# Altium PCB Circuit.PcbDoc (part 1 of 2)
Units mm, origin at the board's own origin, x right, y up, seen from the top; angles counter-clockwise.
Board outline 134.47 x 95.89 mm, 2 copper layers (Top Layer, Bottom Layer); 91 components, 54 nets, 361 pads, 33 vias.
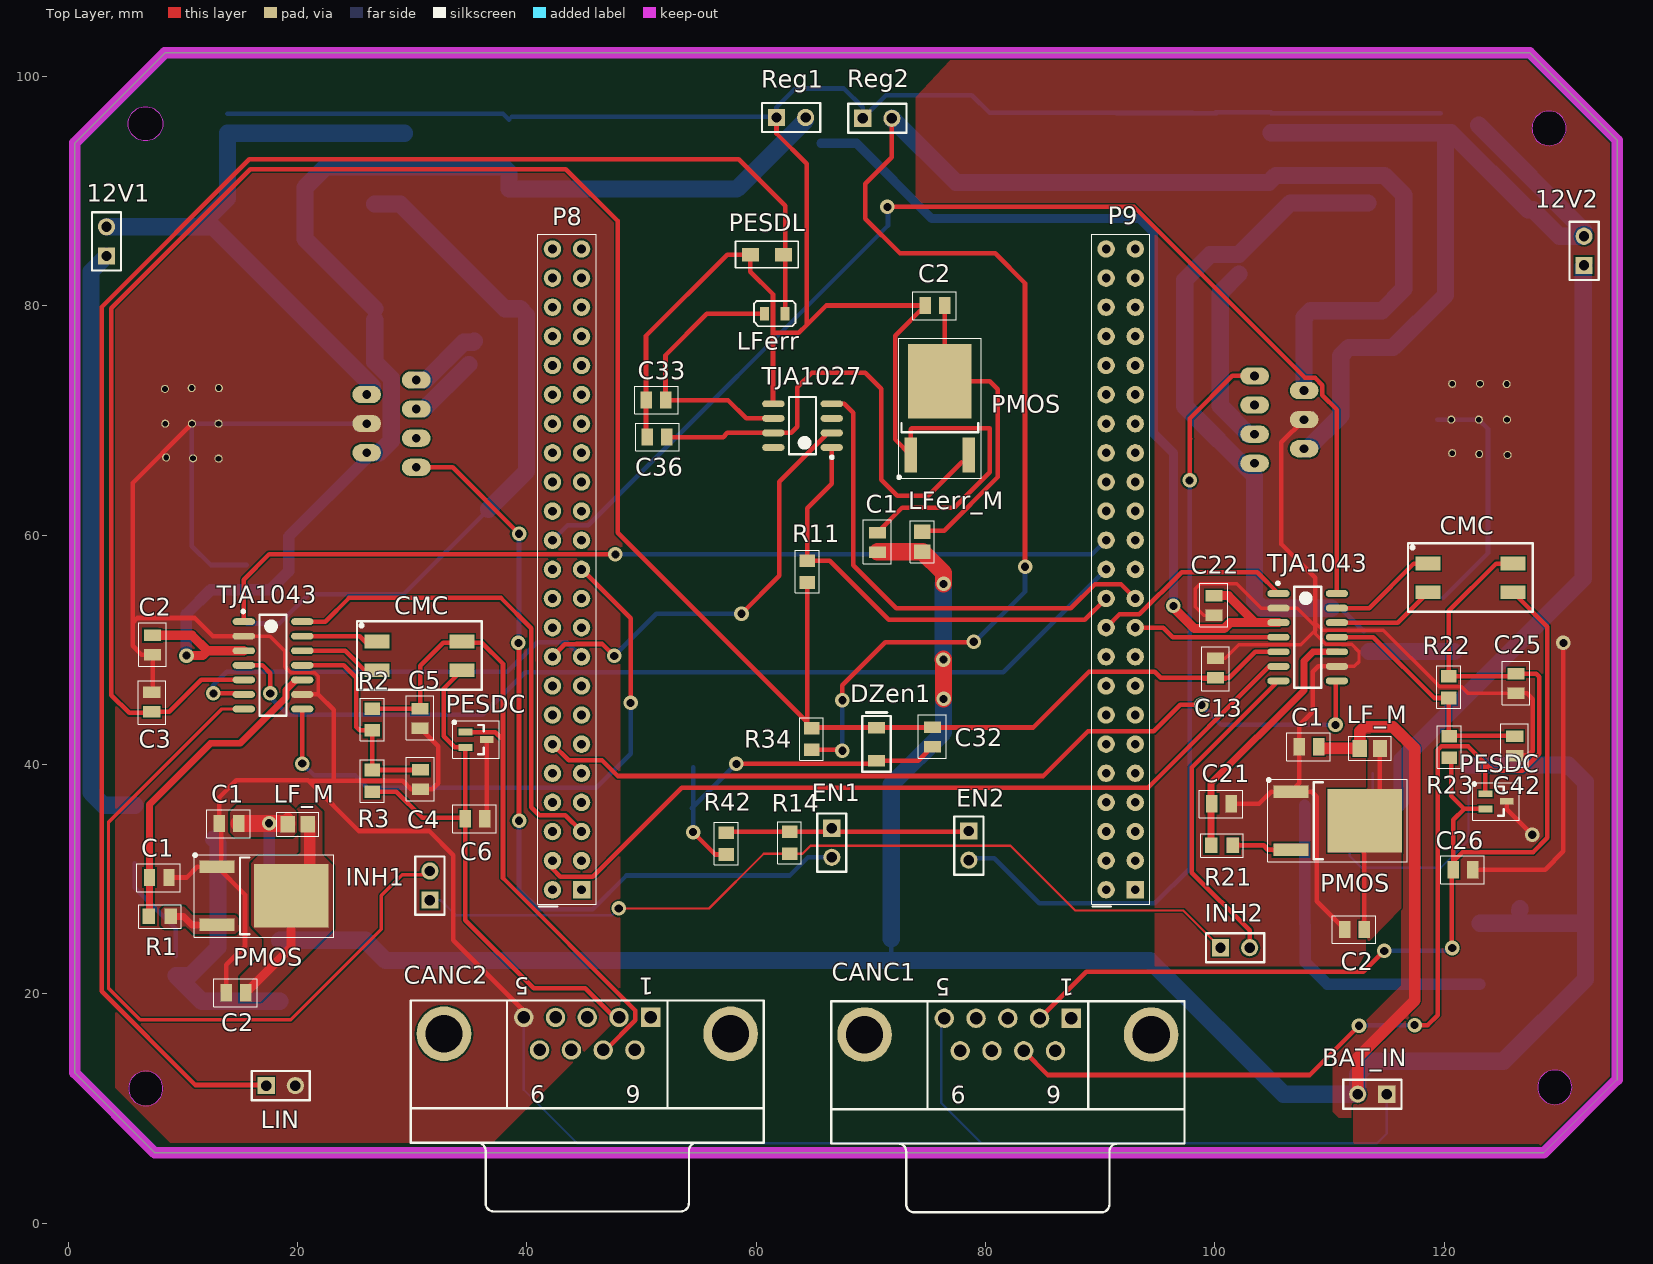
[diagram p0: Top Layer view]
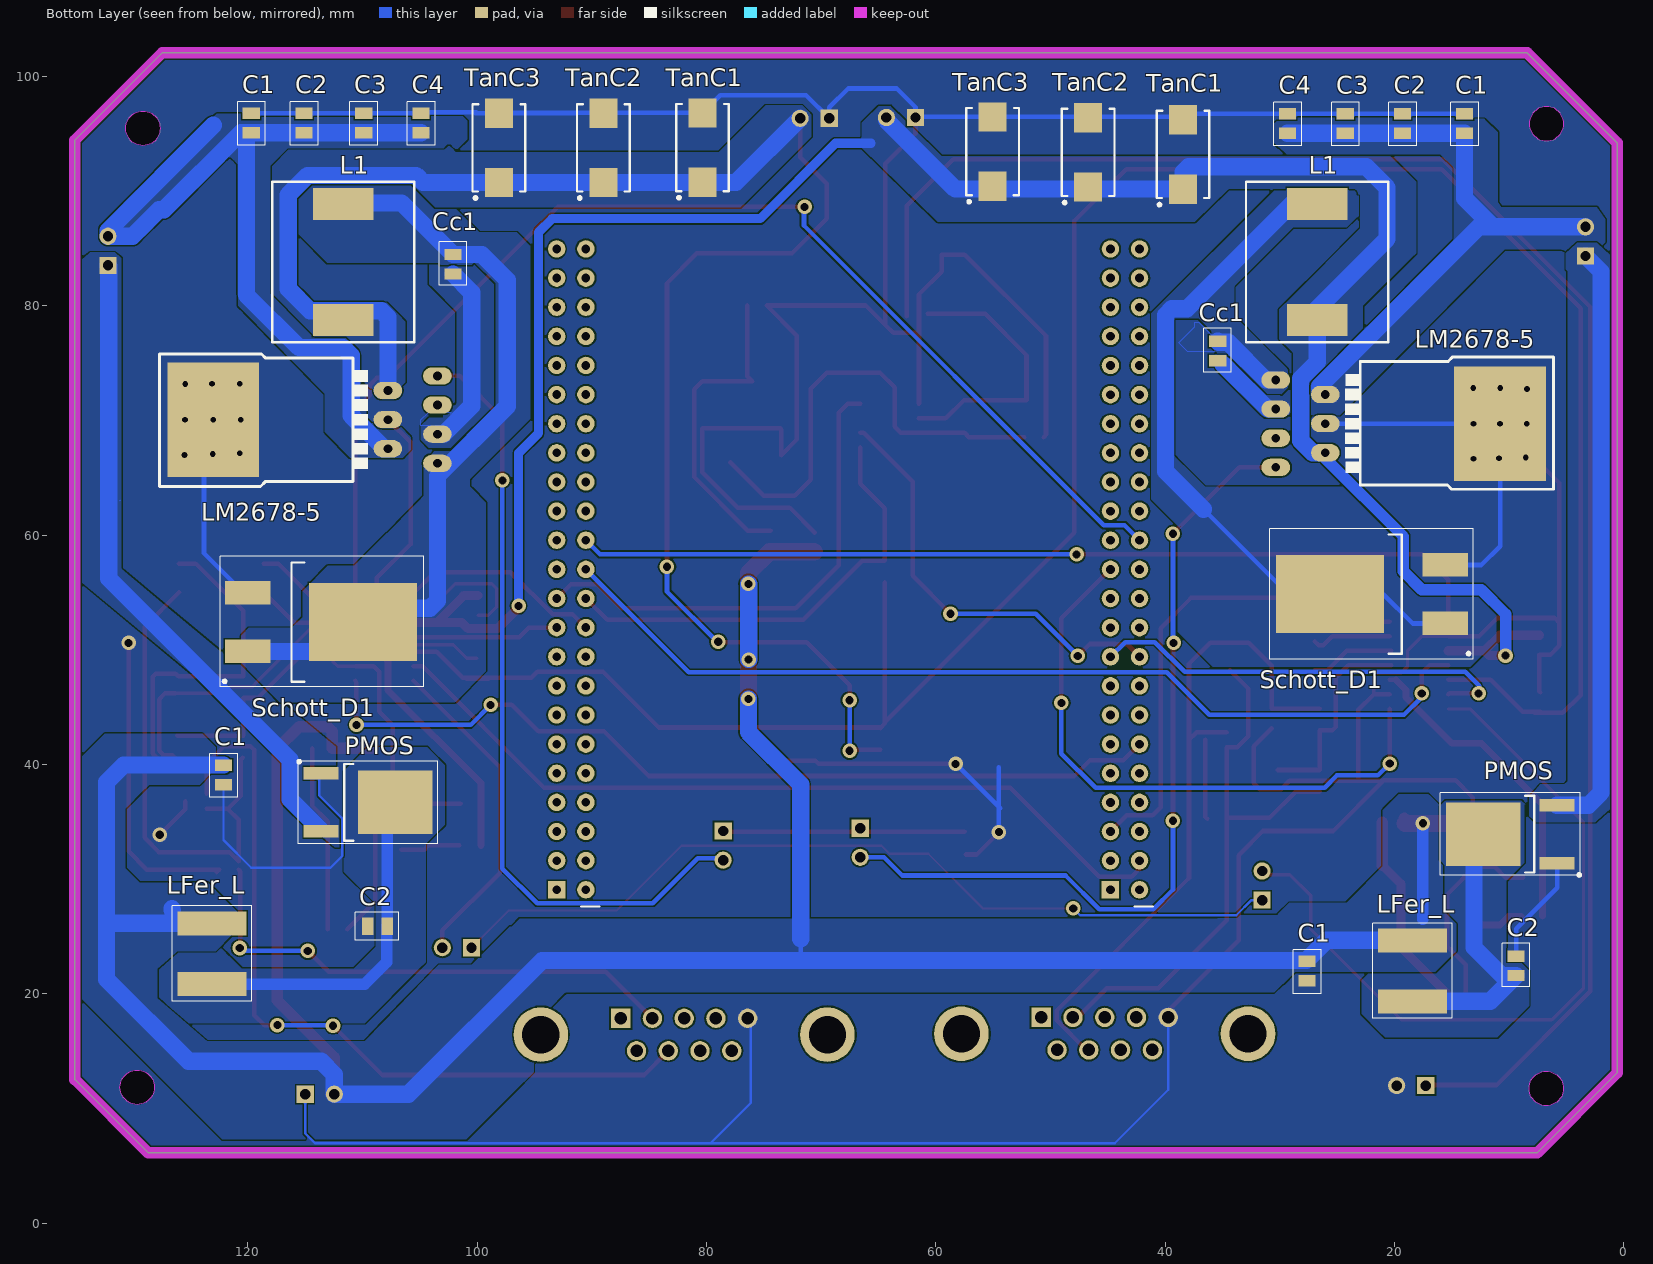
[diagram p1: Bottom Layer view, seen from below]

## Layer stack, top to bottom
Top Layer: signal copper 0.0356
Dielectric: dielectric 0.32, FR-4, Dk 4.8
Bottom Layer: signal copper 0.0356

## Board outline
0.6,13.1 7.545,6.155 128.705,6.155 135.075,12.525 135.075,94.45 127.475,102.05 8.425,102.05 0.6,94.225
cut-out: 128.15,11.85 ccw(c129.65,11.85) 129.65,10.35 ccw(c129.65,11.85) 131.15,11.85 ccw(c129.65,11.85) 129.65,13.35 ccw(c129.65,11.85)
cut-out: 127.65,95.475 ccw(c129.15,95.475) 129.15,93.975 ccw(c129.15,95.475) 130.65,95.475 ccw(c129.15,95.475) 129.15,96.975 ccw(c129.15,95.475)
cut-out: 6.75,94.375 cw(c6.75,95.875) 5.25,95.875 cw(c6.75,95.875) 6.75,97.375 cw(c6.75,95.875) 8.25,95.875 cw(c6.75,95.875)
cut-out: 5.275,11.75 ccw(c6.775,11.75) 6.775,10.25 ccw(c6.775,11.75) 8.275,11.75 ccw(c6.775,11.75) 6.775,13.25 ccw(c6.775,11.75)

## Design rules (kind name [scope] priority, off if disabled: settings)
AssemblyTestPointUsage [All] p1 off:
AssemblyTestpoint [All] p1 off: testpointundercomponent=TRUE minsize=1.016 maxsize=2.54 preferedsize=1.524 minholesize=0 maxholesize=1.016 preferedholesize=0.813 testpointgrid=0.025 usegrid=TRUE gridtolerance=0 allowsidetop=TRUE allowsidebottom=TRUE
Clearance [OnLayer('Mechanical 3') vs InNet('GND') And OnLayer('Bottom Layer')] p1: gap=1
Clearance Clearance-xPP-xTP-xTT [All] p2: gap=0.15
ComponentClearance [All] p1: gap=0.25 collisioncheckmode=3 verticalgap=0.25 showdistances=FALSE
DiffPairsRouting [All] p1: maxlimit=0.25 minlimit=0.25 mostfreqgap=0.25 maxuncoupledlength=12.5
FabricationTestPointUsage [All] p1 off: valid=0 allowmultiple=FALSE
FabricationTestpoint [All] p1 off: side=3 testpointundercomponent=TRUE minsize=1.016 maxsize=2.54 preferedsize=1.524 minholesize=0 maxholesize=1.016 preferedholesize=0.813 testpointgrid=0.025 allowsidetop=TRUE allowsidebottom=TRUE usegrid=TRUE gridtolerance=0
Height [All] p1: minheight=0 maxheight=25 prefheight=12.5
PlaneClearance PlaneClearance-IPI [All] p1: clearance=0.4
PlaneConnect [All] p1: planeconnectstyle=Direct reliefexpansion=0.4 reliefentries=4 reliefconductorwidth=0.2 reliefairgap=0.2
PolygonConnect PolygonConnect-xTW [All] p1: connectstyle=Direct reliefconductorwidth=0.2 reliefentries=4 polygonreliefangle="90 Angle"
RoutingCorners [All] p1: cornerstyle=45-Degree minsetback=2.5 maxsetback=2.5
RoutingVias "RoutingVias > 0.45mm" [(ObjectKind = 'Via') And (HoleDiameter > AsMM(0.45))] p1: holewidth=0.5 width=1 viastyle="Through Hole" minholewidth=0.45 minwidth=0.95 maxholewidth=0.9 maxwidth=1.4 // finishet hole size > 0.45mm
RoutingVias "RoutingVias <= 0.45mm" [(ObjectKind = 'Via') And (HoleDiameter <= AsMM(0.45))] p2: holewidth=0.3 width=0.8 viastyle="Through Hole" minholewidth=0.25 minwidth=0.7 maxholewidth=0.5 maxwidth=1 // finishet hole size <= 0.45mm
SilkscreenOverComponentPads [All] p1: minsilkscreentomaskgap=0.254
SolderMaskExpansion [All] p1: expansion=0.1
Width Width-xTW [All] p1: maxlimit=1.5 minlimit=0.15 preferedwidth=0.2
17 further rules are at their usual default settings.

## Classes and differential pairs
channel class EMI_Prot_Circ: U_EMI_Prot_Circ1 U_EMI_Prot_Circ2 U_EMI_Prot_Circ3
channel class EMI_Prot: U_EMI_Prot_1 U_EMI_Prot_2
channel class 5v_REG_1: U_5v_REG_1 U_5v_REG_2
component class U_Power_Sources: 12V1 12V2 DZen1 EN1 EN2 R14 R34 R42
component class U_LIN: C13 C33 C36 LFerr PESDL R11 TJA1027
component class U_Header_Conn: P8 P9
component class U_EMI_Prot_Circ3: C1 LF_M LFerr PMOS
component class U_EMI_Prot_Circ2: C1 LF_M LFerr PMOS
component class U_EMI_Prot_Circ1: C1 LF_M LFerr PMOS
component class U_EMI_Prot_2: C1 LFer LFer_L PMOS
component class U_EMI_Prot_1: C1 LFer_L PMOS
component class U_Circuit_comp: BAT_IN CANC1 INH1
component class U_5v_REG_2: C1 C3 C4 Cc1 L1 LM2678-5 Schott_D1 TanC1 TanC3
component class U_5v_REG_1: C1 C3 C4 Cc1 L1 LM2678-5 Schott_D1 TanC1 TanC3
component class CAN2: C21 C22 C25 C26 C42 CMC PESDC R21 R22 R23 TJA1043
component class CAN1: C1 C3 C4 C5 C6 CMC PESDC R2 R3 TJA1043

## Components (designator, comment, footprint, x,y, rotation, side; value= is the part's Value field where it differs from the comment)
12V1 "Header 2" HDR1X2 3.35,84.35 r90 top (schematic designator J_12V1)
12V2 "Header 2" HDR1X2 132.2,83.525 r90 top (schematic designator J_12V2)
BAT_IN "Header 2" HDR1X2 115,11.25 r180 top
C1 "Cap Semi" CAP_0805 7.95,30.15 r180 top
C1 "Cap Semi" CAP_0805 70.575,59.375 r90 top
C1 "Cap Semi" CAP_0805 108.225,41.55 r180 top
C1 "Cap Semi" CAP_0805 14.05,34.85 r180 top
C1 "Cap Semi" CAP_0805 122.125,39.1 r270 bottom
C1 "Cap Semi" CAP_0805 27.625,21.975 r270 bottom
C1 "Cap Semi" CAP_0805 119.7,95.95 r270 bottom
C1 "Cap Semi" CAP_0805 13.9,95.9 r270 bottom
C2 "Cap Semi" CAP_0805 75.6,80.025 r180 top
C2 "Cap Semi" CAP_0805 112.175,25.625 r180 top
C2 "Cap Semi" CAP_0805 14.65,20.1 r180 top
C2 "Cap Semi" CAP_0805 108.7,25.9 r0 bottom
C2 "Cap Semi" CAP_0805 9.4,22.45 r90 bottom
C2 "Cap Semi" CAP_0805 115.1,95.95 r270 bottom
C2 "Cap Semi" CAP_0805 19.3,95.9 r270 bottom
C2 "Cap Semi" CAP_0805 7.375,50.425 r90 top
C3 "Cap Semi" CAP_0805 7.3,45.45 r270 top
C3 "Cap Semi" CAP_0805 109.9,95.95 r270 bottom
C3 "Cap Semi" CAP_0805 24.3,95.9 r270 bottom
C4 "Cap Semi" CAP_0805 30.725,38.7 r90 top
C4 "Cap Semi" CAP_0805 104.9,95.95 r270 bottom
C4 "Cap Semi" CAP_0805 29.325,95.9 r270 bottom
C5 "Cap Semi" CAP_0805 30.7,44.025 r90 top
C6 "Cap Semi" CAP_0805 35.5,35.275 r180 top
C13 "Cap Semi" CAP_0805 100.05,48.4 r270 top
C21 "Cap Semi" CAP_0805 100.6,36.575 r180 top
C22 "Cap Semi" CAP_0805 99.925,53.875 r90 top
C25 "Cap Semi" CAP_0805 126.275,47.05 r90 top
C26 "Cap Semi" CAP_0805 121.65,30.825 r180 top
C32 "Cap Semi" CAP_0805 75.375,42.4 r90 top
C33 "Cap Semi" CAP_0805 51.25,71.775 r0 top
C36 "Cap Semi" CAP_0805 51.35,68.55 r0 top
C42 "Cap Semi" CAP_0805 126.15,41.6 r90 top
CANC1 "D Connector 9" DSUB1.385-2H9 81.95,6.95 r180 top
CANC2 "D Connector 9" DSUB1.385-2H9 45.275,7.025 r180 top
Cc1 "Cap Semi" CAP_0805 102.1,83.625 r90 bottom
Cc1 "Cap Semi" CAP_0805 35.425,76.075 r90 bottom
CMC "Common_Mode_Choke" CMC 30.65,49.525 r0 top
CMC "Common_Mode_Choke" CMC 122.3,56.325 r0 top (schematic designator CMC2)
DZen1 "D_Zener" ZENER_DIODE 70.5,41.775 r270 top
EN1 "Header 2" HDR1X2 66.6,34.45 r270 top (schematic designator J_EN1)
EN2 "Header 2" HDR1X2 78.55,34.2 r270 top (schematic designator J_EN2)
INH1 "Header 2" HDR1X2 31.55,28.175 r90 top
INH2 "Header 2" HDR1X2 100.5,24.025 r0 top (schematic designator J_INH2)
L1 "Inductor" INDUCTOR_REG 111.675,83.825 r90 bottom
L1 "Inductor" INDUCTOR_REG 26.75,83.825 r90 bottom
LF_M "LFerrite_Murata" LFERRITE_MURATA_BLM21A 113.525,41.4 r0 top (schematic designator LFerr_M)
LF_M "LFerrite_Murata" LFERRITE_MURATA_BLM21A 20.025,34.775 r0 top (schematic designator LFerr_M)
LFer_L "LFerrite_Laird" LFERRITE_LAIRD 123.125,23.5 r270 bottom (schematic designator LFer_Lai)
LFer_L "LFerrite_Laird" LFERRITE_LAIRD 18.45,22 r270 bottom (schematic designator LFer_Lai)
LFerr "MMZ2012 Y202B" LFERRITE 61.625,79.3 r0 top (schematic designator LFerrite)
LFerr_M "LFerrite_Murata" LFERRITE_MURATA_BLM21A 74.5,59.425 r90 top
LIN "Header 2" HDR1X2 17.275,12 r0 top (schematic designator LIN_Conn)
LM2678-5 "LM2678-2207-5V" TO2207-LM2678 123.025,70.075 r90 bottom
LM2678-5 "LM2678-2207-5V" TO2207-LM2678 10.8,69.725 r270 bottom
P8 "FEMALE HEADER 2x23" BEAGLE_HEADER 43.481,57.018 r90 top
P9 "FEMALE HEADER 2x23" BEAGLE_HEADER 91.764,57.021 r90 top
PESDC "PESD1CAN" SOT32-PESD1CAN 35.55,42.175 r0 top (schematic designator PESD1CAN)
PESDC "PESD1CAN" SOT32-PESD1CAN 124.5,36.8 r0 top (schematic designator PESD1CAN2)
PESDL "PESD1LIN" SOD323-PESD1LIN 60.95,84.475 r0 top (schematic designator PESD1LIN)
PMOS "PMOS" PMOS 76.025,71.025 r90 top
PMOS "PMOS" PMOS 110.675,35.1 r0 top
PMOS "PMOS" PMOS 17.05,28.55 r0 top
PMOS "PMOS" PMOS 109.55,36.7 r180 bottom
PMOS "PMOS" PMOS 9.875,33.925 r0 bottom
R1 "Res3" RES_0805 8,26.75 r180 top
R2 "Res3" RES_0805 26.525,43.925 r90 top
R3 "Res3" RES_0805 26.525,38.575 r90 top
R11 "" RES_0805 64.45,56.825 r270 top
R14 "Res3" RES_0805 62.925,33.175 r90 top
R21 "Res3" RES_0805 100.625,32.95 r180 top
R22 "Res3" RES_0805 120.4,46.75 r90 top
R23 "Res3" RES_0805 120.45,41.525 r90 top
R34 "Res3" RES_0805 64.85,42.225 r90 top
R42 "Res3" RES_0805 57.4,33.1 r90 top
Reg1 "Header 2" HDR1X2 61.775,96.425 r0 top (schematic designator Reg1_conn)
Reg2 "Header 2" HDR1X2 69.3,96.35 r0 top (schematic designator Reg2_conn)
Schott_D1 "Schottky_Diode" SCHOTTKY_DIODE#1 113.65,52.425 r180 bottom
Schott_D1 "Schottky_Diode" SCHOTTKY_DIODE#2 21.925,54.85 r0 bottom
TanC1 "Tantalum_Capacitor" CAP_TANT 80.35,93.8 r90 bottom (schematic designator TanCap1)
TanC1 "Tantalum_Capacitor" CAP_TANT 38.45,93.2 r90 bottom (schematic designator TanCap1)
TanC2 "Tantalum_Capacitor" CAP_TANT 89,93.775 r90 bottom (schematic designator TanCap2)
TanC2 "Tantalum_Capacitor" CAP_TANT 46.725,93.375 r90 bottom (schematic designator TanCap2)
TanC3 "Tantalum_Capacitor" CAP_TANT 98.1,93.775 r90 bottom (schematic designator TanCap3)
TanC3 "Tantalum_Capacitor" CAP_TANT 55.05,93.45 r90 bottom (schematic designator TanCap3)
TJA1027 "TJA1027" SOIC8-TJA1027 64.05,69.55 r180 top
TJA1043 "TJA1043" SOIC14-TJA1043#1 108.1,51.1 r0 top (schematic designator TJA10432)
TJA1043 "TJA1043" SOIC14-TJA1043#2 17.875,48.65 r0 top (schematic designator TJA1043-1)

## Footprints (in the part's own frame and the unit in brackets; to place one, negate y for a bottom-side part, rotate by r counter-clockwise, add the part's x,y. Pads: shape width x height; smd on the part's side, far side on the other; paste and mask are expansions set on the pad)
BEAGLE_HEADER [mil]
  rect 60x60 hole 30 mask+2: 1(-1100.11,-51.11)
  round 60 hole 30 mask+2: 2(-1100.11,48.89) 3(-1000.11,-51.11) 4(-1000.11,48.89) 5(-900.11,-51.11) 6(-900.11,48.89) 7(-800.11,-51.11) 8(-800.11,48.89) 9(-700.11,-51.11) 10(-700.11,48.89) 11(-600.11,-51.11) 12(-600.11,48.89) 13(-500.11,-51.11) 14(-500.11,48.89) 15(-400.11,-51.11) 16(-400.11,48.89) 17(-300.11,-51.11) 18(-300.11,48.89) 19(-200.11,-51.11) 20(-200.11,48.89) 21(-100.11,-51.11) 22(-100.11,48.89) 23(-0.11,-51.11) 24(-0.11,48.89) 25(99.89,-51.11) 26(99.89,48.89) 27(199.89,-51.11) 28(199.89,48.89) 29(299.89,-51.11) 30(299.89,48.89) 31(399.89,-51.11) 32(399.89,48.89) 33(499.89,-51.11) 34(499.89,48.89) 35(599.89,-51.11) 36(599.89,48.89) 37(699.89,-51.11) 38(699.89,48.89) 39(799.89,-51.11) 40(799.89,48.89) 41(899.89,-51.11) 42(899.89,48.89) 43(999.89,-51.11) 44(999.89,48.89) 45(1099.89,-51.11) 46(1099.89,48.89)
  silkscreen extent -1158,-101 1150,99
CAP_0805 [mm] "Chip Capacitor, 2-Leads, Body 2,0x1,3mm, IPC Medium Density"
  rect 1x1.5 smd: 1(-0.85,0) 2(0.85,0)
  silkscreen extent -1.85,-1.2 1.95,1.22, body extent -1.1,-0.72 1.1,0.72, height 1
CAP_TANT [mm] "Molded Capacitor, 2-Leads, Body 7,3x4,3mm, IPC Medium Density"
  rect 2.55x2.45 smd: 1(-3.025,0) 2(3.025,0)
  silkscreen extent -4.5,-2.3 3.8,2.3, body extent -3.8,-2.3 3.8,2.3, height 3.1
CMC [mm]
  rect 2.2x1.2 smd: IN1(-3.7,1.2) IN2(-3.7,-1.3) OUT1(3.7,1.2) OUT2(3.7,-1.3)
  silkscreen extent -5.45,-3 5.43,2.98, body extent -3.6,-2.9 3.7,2.8, height 1.3
DSUB1.385-2H9 [mm] "Connector; D Subminiature; 9 Position; Right Angle; Pitch 1.385 mm"
  rect 1.69x1.69 hole 1.09: 1(-5.54,-10.92)
  round 1.69 hole 1.09: 2(-2.77,-10.92) 3(0,-10.92) 4(2.77,-10.92) 5(5.54,-10.92) 6(-4.155,-8.08) 7(-1.385,-8.08) 8(1.385,-8.08) 9(4.155,-8.08)
  round 4.76 hole 3.26: 10(-12.495,-9.5) 11(12.495,-9.5)
  silkscreen extent -15.4,-12.4 15.4,6
HDR1X2 [mm] "Connector; Header; 2 Position"
  rect 1.5x1.5 hole 0.9: 1(0,0)
  round 1.5 hole 0.9: 2(2.54,0)
  silkscreen extent -1.27,-1.27 3.81,1.27
INDUCTOR_REG [mm] "http://www.mouser.es/ProductDetail/Bourns/SRR1210-150M/?qs=sGAEpiMZZMsg%252by3WlYCkUxKwhsadNScOnUzWVEJhwXc%3d"
  rect 2.8x5.3 smd: 1(5.05,0) 2(-5.05,0)
  silkscreen extent -7,-6.2 7,6.2, body extent -6.2,-6.1 6.2,6.1, height 10
LFERRITE [mm]
  rect 0.8x1.2 smd: 1(-0.9,0) 2(0.9,0)
  silkscreen extent -1.8,-1.07 1.8,1.12, body extent -1.2,-0.5 1.2,0.5, height 1
LFERRITE_LAIRD [mm] "Chip Inductor, 2-Leads, Body 5,6x5,1mm, IPC Medium Density"
  rect 2.1x6 smd: 1(-2.65,0) 2(2.65,0)
  silkscreen extent -4.18,-3.45 4.13,3.47, body extent -3.05,-2.66 3.05,2.67, height 3.3
LFERRITE_MURATA_BLM21A [mm] "Chip Inductor, 2-Leads, Body 2,0x1,3mm, IPC Medium Density"
  rect 1.25x1.45 smd: 1(-0.875,0) 2(0.875,0)
  silkscreen extent -1.83,-1.05 1.85,1.07, body extent -1.1,-0.72 1.1,0.72, height 1.05
PMOS [mm] "D-PAK, 3-Pads, Body 6,2x6,7mm (max), IPC Medium Density"
  rect 6.5x5.55 smd: D(2.4,0)
  rect 3.05x1.1 smd: G(-4.05,2.529) S(-4.05,-2.529)
  silkscreen extent -6.1,-3.6 6.12,3.67, body extent -2.05,-3.35 4.15,3.35, height 2.39
RES_0805 [mm] "Chip Resistor, 2-Leads, Body 2,0x1,3mm, IPC Medium Density"
  rect 1.1x1.35 smd: 1(-0.95,0) 2(0.95,0)
  silkscreen extent -1.85,-1.02 1.85,1.05, body extent -1.05,-0.67 1.05,0.67, height 0.65
SCHOTTKY_DIODE#1 [mm] "D2-PAK, 3-Pads, Body 9,1x10,4mm (max), IPC Medium Density"
  rect 3.95x2.05 smd: 1(-6.35,-2.55) 2(-6.35,2.55)
  rect 9.4x6.8 smd: 1(3.7,0)
  silkscreen extent -8.77,-5.65 8.98,5.72, body extent -2.55,-5.23 6.59,5.22, height 4.83
SCHOTTKY_DIODE#2 [mm] "D2-PAK, 3-Pads, Body 9,1x10,4mm (max), IPC Medium Density"
  rect 3.95x2.05 smd: 1(-6.35,2.55) 2(-6.35,-2.55)
  rect 9.4x6.8 smd: 1(3.7,0)
  silkscreen extent -8.77,-5.72 8.98,5.65, body extent -2.55,-5.22 6.59,5.23, height 4.83
SOD323-PESD1LIN [mm]
  rect 1.5x1.2 smd: D1(-1.45,-0.025) D2(1.45,-0.025)
  silkscreen extent -2.75,-1.15 2.73,1.15, body extent -1.35,-0.9 1.35,0.9, height 1.3
SOIC8-TJA1027 [mm] "SOIC, 8-Leads, Body 5,0x4,0mm (max), Pitch 1,27mm, IPC Medium Density"
  oval 1.95x0.6 smd: BAT(2.55,0.635) GND(2.55,-1.905) LIN(2.55,-0.635) NC(-2.55,-0.635) NC(2.55,1.905) RXDL(-2.55,1.905) SLPN(-2.55,0.635) TXDL(-2.55,-1.905)
  silkscreen extent -2.68,-2.5 1.17,2.88, body extent -2,-2.5 2,2.5, height 1.75
SOIC14-TJA1043#1 [mm] "SOIC, 14-Leads, Body 8,8x4,0mm (max), Pitch 1,27mm, IPC Medium Density"
  oval 1.95x0.6 smd: BAT(2.55,-1.27) CANH(2.55,2.54) CANL(2.55,1.27) EN(-2.55,-2.54) ERR_N(2.55,-3.81) GND(-2.55,2.54) INH(-2.55,-3.81) RXD(-2.55,0) SPLIT(2.55,0) STB_N(2.55,3.81) TXD(-2.55,3.81) VCC(-2.55,1.27) VIO(-2.55,-1.27) WAKE(2.55,-2.54)
  silkscreen extent -2.72,-4.4 1.17,4.82, body extent -2,-4.38 2,4.38, height 1.75
SOIC14-TJA1043#2 [mm] "SOIC, 14-Leads, Body 8,8x4,0mm (max), Pitch 1,27mm, IPC Medium Density"
  oval 1.95x0.6 smd: BAT(2.55,-1.27) CANH(2.55,2.54) CANL(2.55,1.27) EN(-2.55,-2.54) ERR_N(2.55,-3.81) GND(-2.55,2.54) INH(-2.55,-3.81) SPLIT(2.55,0) STB_N(2.55,3.81) TXD(-2.55,3.81) VCC(-2.55,1.27) VIO(-2.55,-1.27) WAKE(2.55,-2.54)
  oval 1.95x0.6 smd paste+0 mask+0: RXD(-2.55,0)
  silkscreen extent -2.72,-4.4 1.17,4.82, body extent -2,-4.38 2,4.38, height 1.75
SOT32-PESD1CAN [mm] "SOT23, 3-Leads, Body 3,0x2,5mm (max), Pitch 0,95mm, IPC Medium Density"
  rect 1.2x0.6 smd: I1(-0.9,0.65) I2(-0.9,-0.675) O1(0.95,0)
  silkscreen extent -2.02,-1.65 2.05,1.63, body extent -0.7,-1.28 0.7,1.28, height 1.1
TO2207-LM2678 [mm]
  oval 1.5x2.5 hole 0.762: CB(-1.27,-19.558) EN(3.81,-19.558) FB(2.54,-15.24) GND(0,-15.24) In(-2.54,-15.24) NC(1.27,-19.558) S_Out(-3.81,-19.558)
  rect 10x8 smd: GND(0,0)
  silkscreen extent -5.82,-13.52 5.72,4.67, body extent -5.46,-12.32 5.33,3.3, height 4.6
ZENER_DIODE [mm] "http://www.mouser.com/ds/2/115/BZT52HC2V4WF%20-%20BZT52HC47WF-948206.pdf"
  rect 1x1.5 smd: D1(-1.45,0) D2(1.45,0)
  silkscreen extent -2.75,-1.25 2.4,1.25, body extent -1.5,-1 1.5,1, height 1

## Part data
12V1 12V2 BAT_IN EN1 EN2 INH1 INH2 LIN Reg1 Reg2: "Header, 2-Pin"
C1 C1 C1 C1 C1 C1 C1 C1 C2 C2 C2 C2 C2 C2 C2 C2 C3 C3 C3 C4 C4 C5 C6 C13 C21 C22 C25 C26 C32 C33 C36 Cc1 Cc1: "Capacitor (Semiconductor SIM Model)"
C4 C42: "Capacitor"
CANC1 CANC2: "Receptacle Assembly, 9 Position, Right Angle"
CMC CMC: "Common mode choke: DR331-475BE"
DZen1: "Zener Diode 3.3V"
LF_M LF_M LFerr_M: "Ferrite chip bead - BLE32PN300SN1L"
LFer_L LFer_L: "Ferrite chip bead"
LFerr: library part LFerrite, "Ferrite chip bead for signal line"
LM2678-5 LM2678-5: "5V step down regulator (5A)"
P8 P9: library part BHead, "BeagleBone Headers"
PESDC PESDC: "CAN bus ESD protection diode"
PESDL: "LIN-bus ESD protection diodes"
PMOS PMOS PMOS PMOS PMOS: "P channel Mosfet"
R1 R2 R3 R14 R21 R22 R23 R34 R42: "Resistor"
R11: library part Res3, "Resistor"
Schott_D1 Schott_D1: "Schottky barrier rectifier"
TanC1 TanC1 TanC2 TanC2 TanC3 TanC3: "Tantalum Capacitor by Kemet"
TJA1027: "LIN transceiver without INH"
TJA1043 TJA1043: "CAN transceiver"

## Free pads (board coordinates)
  round 0.7 hole 0.5: 1(8.45,72.75) 1(8.475,69.725) 1(8.55,66.775) 1(10.775,72.825) 1(10.8,69.725) 1(10.9,66.7) 1(13.125,66.675) 1(13.125,69.725) 1(13.15,72.825) 1(120.625,70.075) 1(120.7,67.15) 1(120.7,73.2) 1(123.025,70.075) 1(123.05,67.075) 1(123.125,73.2) 1(125.45,73.175) 1(125.475,70.075) 1(125.525,67)

## Via types
v1: diameter 1.27, hole 0.711, Top Layer to Bottom Layer, 33 vias

## Nets (pads, with @x,y where several pads share a name; then routed paths per layer and width w, separated by ;. In a path a pad name is that pad's centre, name@x,y a point inside that pad or via, vN(x,y) a via of type N, cw(c..) or ccw(c..) an arc to the next point about the centre after c; other vN are vias at no path point)
GND: BAT_IN.1 C1.1@8.8,30.15 C1.1@13.9,96.75 C1.1@119.7,96.8 C1.2@13.2,34.85 C1.2@27.625,21.125 C1.2@70.575,60.225 C1.2@107.375,41.55 C1.2@122.125,38.25 C2.1@7.375,49.575 C2.1@19.3,96.75 C2.1@115.1,96.8 C2.2@9.4,23.3 C2.2@13.8,20.1 C2.2@74.75,80.025 C2.2@109.55,25.9 C2.2@111.325,25.625 C3.1 C4.1 C5.1 C6.1 C13.1 C21.1 C22.1 C25.1 C26.1 C32.1 C33.1 C36.1 C42.1 CANC1.5 CANC2.5 DZen1.D2 LIN.2 LM2678-5.GND pad.1 PESDC.O1 PESDL.D1 PMOS.G R42.1 Reg1.1 Reg2.1 Schott_D1.2 TanC1.2 TanC2.2 TanC3.2 TJA1027.GND TJA1043.GND TJA1043.WAKE | length 736.5
  Top Layer w0.2: CANC2.5@39.735,17.945 CANC2.5@39.735,18.54
  Top Layer w0.3: TJA1043.GND@15.325,51.19 17.61,51.19 18.875,49.925 18.875,48.55 19.425,48 21.525,48 21.825,47.7 21.825,46.11 ; C22.1@99.925,53.025 99.025,53.025 98.275,53.775 98.275,55.325 98.725,55.775 101.9,55.775 104.035,53.64 TJA1043.GND@105.55,53.64 107.185,53.64 108.75,52.075 ; C13.1@100.05,49.25 100.9,49.25 102.1,50.45 107.5,50.45 108.75,51.7 108.75,51.4 109.675,50.475 111.925,50.475 112.575,49.825 112.575,48.975 112.16,48.56 TJA1043.WAKE@110.65,48.56 ; 108.75,52.35 109.4,51.7 114.7,51.7 119.375,47.025 ; 119.375,47.005 119.58,46.8 121.475,46.8 122.075,46.2 C25.1@126.275,46.2
  Top Layer w0.4: C3.1@7.3,46.3 7.375,46.375 C2.1@7.375,49.575 6.4,49.575 5.625,50.35 5.625,52.375 ; C1.1@8.8,30.15 10.35,30.15 11.279,31.079 PMOS.G@13,31.079 ; pad.1@10.8,69.725 5.625,64.55 5.625,52.375 ; C1.2@13.2,34.85 13.2,37.15 14.675,38.625 20.925,38.625 20.975,38.575 ; C1.2@13.375,35.025 13.375,31.304 13.15,31.079 PMOS.G@13,31.079 ; C2.2@13.8,20.1 13.8,22.525 15.425,24.15 15.425,28.654 PMOS.G@13,31.079 ; TJA1043.GND@15.325,51.19 12.635,51.19 11.05,52.775 6.025,52.775 5.625,52.375 ; TJA1043.WAKE@20.425,46.11 21.825,46.11 23.175,44.76 23.175,38.575 ; C5.1@30.7,43.175 32.275,41.6 32.275,38.375 31.75,37.85 C4.1@30.725,37.85 29.9,37.85 29.175,38.575 23.175,38.575 ; C6.1@36.35,35.275 36.5,35.425 PESDC.O1@36.5,42.175 ; CANC2.5@39.735,18.54 33.6,24.675 33.6,32.1 31.5,34.2 25.35,34.2 20.975,38.575 ; C36.1@50.6,68.55 50.4,68.75 C33.1@50.4,71.775 50.4,77.375 57.475,84.45 PESDL.D1@59.5,84.45 59.5,82.975 61.475,81 61.475,71.48 TJA1027.GND@61.5,71.455 ; v1(54.5,34.1) 56.45,32.15 R42.1@57.4,32.15 ; v1(58.275,40.05) 70.225,40.05 DZen1.D2@70.5,40.325 74.15,40.325 C32.1@75.375,41.55 ; 61.475,77.725 61.55,77.65 63.725,77.65 64.4,78.325 ; Reg1.1@61.775,96.425 61.775,95.025 64.4,92.4 64.4,78.325 ; C1.2@70.575,60.225 72.725,62.375 77.275,62.375 80.375,65.475 80.375,69.325 73.575,69.325 73.496,69.246 PMOS.G@73.496,66.975 72.125,68.346 72.125,77.4 C2.2@74.75,80.025 66.1,80.025 64.4,78.325 ; C21.1@101.45,36.575 103.85,36.575 104.904,37.629 PMOS.G@106.625,37.629 ; LM2678-5.GND@107.785,70.075 105.8,68.09 105.8,59.225 108.75,56.275 108.75,52.35 108.75,52.075 108.75,51.7 ; TJA1043.WAKE@110.65,48.56 109.01,48.56 108.55,48.1 108.55,44.6 107.375,43.425 C1.2@107.375,41.55 107.375,38.379 PMOS.G@106.625,37.629 ; C2.2@111.325,25.625 108.875,28.075 108.875,37.2 108.446,37.629 PMOS.G@106.625,37.629 ; C26.1@122.7,30.625 C26.1@122.5,30.825 128.8,30.825 130.4,32.425 v1(130.4,50.6) ; PESDC.O1@125.45,36.8 125.45,36.1 v1(127.675,33.875) ; C42.1@126.275,40.5 126.575,40.8 127.325,40.8 127.725,41.2 127.725,45.7 127.225,46.2 C25.1@126.275,46.2 ; 20.975,38.575 23.175,38.575
  Bottom Layer w0.2: CANC2.5@39.735,17.945 39.735,11.64 44.4,6.975 79.65,6.975 ; CANC1.5@76.41,17.87 76.15,17.61 76.15,10.475 79.65,6.975 ; PMOS.G@113.775,39.25 113.775,37.3 111.775,35.3 111.775,32.025 112.8,31 119.7,31 122.125,33.425 C1.2@122.125,38.25 ; BAT_IN.1@115,11.25 115,7.825 114.15,6.975 79.65,6.975
  Bottom Layer w0.4: PMOS.G@5.825,31.396 5.825,29.25 9.4,25.675 C2.2@9.4,23.3 ; C1.1@13.9,96.75 C2.1@19.3,96.75 C3.1@24.3,96.75 C4.1@29.325,96.75 37.925,96.75 TanC1.2@38.45,96.225 ; Schott_D1.2@15.575,57.4 12.45,57.4 10.8,59.05 pad.1@10.8,69.725 LM2678-5.GND@26.04,69.725 ; TanC1.2@38.7,96.475 TanC3.2@55.05,96.475 61.725,96.475 Reg1.1@61.775,96.425 61.775,97.325 63.4,98.95 67.65,98.95 69.3,97.3 Reg2.1@69.3,96.35 71.325,98.375 78.8,98.375 TanC1.2@80.35,96.825 TanC3.2@98.075,96.825 ; 54.4,36.175 v1(58.275,40.05) ; v1(54.5,34.1) 54.5,39.75 ; 91.425,96.8 100.15,96.8 100.075,96.875 C4.1@104.9,96.875 ; C4.1@104.9,96.8 C3.1@109.9,96.8 C2.1@115.1,96.8 C1.1@119.7,96.8 ; LM2678-5.GND@119.4,70.075 pad.1@123.025,70.075 123.825,69.275 123.825,58.425 Schott_D1.2@119.925,54.525
GPIO0_27: P8.17 TJA1043.EN@15.325,46.11 | length 37.6
  Top Layer w0.4: v1(12.675,46.2) 15.235,46.2 TJA1043.EN@15.325,46.11
  Bottom Layer w0.4: v1@12.625,46.25 12.625,46.875 13.825,48.075 38.3,48.075 40.9,50.675 43.5,50.675 P8.17@44.779,49.395
GPIO1_12: P8.12 TJA1043.ERR_N@110.65,47.29 | length 76.6
  Top Layer w0.4: P8.12@42.239,41.775 43.65,40.365 46.56,40.365 47.925,39 85.05,39 88.94,42.89 94.665,42.89 96.975,45.2 v1(98.825,45.2) ; v1(110.525,43.45) 110.55,43.475 110.55,47.19 TJA1043.ERR_N@110.65,47.29
  Bottom Layer w0.4: v1(98.825,45.2) 100.575,43.45 v1@110.55,43.45
GPIO1_29: P8.26 TJA1043.STB_N@110.65,54.91 | length 105.3
  Top Layer w0.4: v1@71.475,88.65 v1(71.45,88.625) 92.95,88.625 107.86,73.715 108.741,73.715 109.385,73.071 109.385,72.19 110.65,70.925 TJA1043.STB_N@110.65,54.91
  Bottom Layer w0.4: P8.26@42.239,59.555 43.55,60.866 45.366,60.866 71.5,87 v1@71.5,88.525
GPIO2_1: P8.18 TJA1027.SLPN | length 38.1
  Top Layer w0.4: P8.18@42.239,49.395 43.319,50.475 44.286,50.475 44.319,50.507 46.593,50.507 v1(47.625,49.475) ; v1(58.725,53.15) 62.025,56.45 62.025,64.664 66.276,68.915 TJA1027.SLPN@66.6,68.915
  Bottom Layer w0.4: v1(47.625,49.475) 51.3,53.15 v1(58.725,53.15)
I2C2_SCL: P9.19 TJA1043.RXD@105.55,51.1 | length 12.8
  Top Layer w0.4: P9.19@93.062,51.938 95.487,51.938 96.325,51.1 TJA1043.RXD@105.55,51.1
I2C2_SDA: P9.20 TJA1043.TXD@105.55,54.91 | length 17.8
  Top Layer w0.4: P9.20@90.522,51.938 91.684,53.1 93.425,53.1 97.1,56.775 103.685,56.775 TJA1043.TXD@105.55,54.91
MMC1_DAT2: P8.5 TJA1043.STB_N@20.425,52.46 | length 42.8
  Top Layer w0.4: TJA1043.STB_N@20.425,52.46 22.435,52.46 24.5,54.525 37.75,54.525 40.4,51.875 40.4,36.275 41.092,35.583 43.351,35.583 P8.5@44.779,34.155
MMC1_DAT4: P8.23 TJA1043.ERR_N@20.425,44.84 | length 53.3
  Top Layer w0.4: v1(20.425,40.075) TJA1043.ERR_N@20.425,44.84 ; P8.23@44.779,57.015 49.05,52.745 v1(49.05,45.375)
  Bottom Layer w0.4: v1(20.425,40.075) 21.45,39.05 25.025,39.05 26.1,37.975 46.075,37.975 49.05,40.95 v1(49.05,45.375)
MMC1_DAT7: P8.4 TJA1043.EN@105.55,48.56 | length 71.9
  Top Layer w0.4: P8.4@42.239,31.615 42.239,30.911 42.925,30.225 45.75,30.225 53.5,37.975 94.175,37.975 104.76,48.56 TJA1043.EN@105.55,48.56
NetBAT_IN_2: BAT_IN.2 C1.1@14.9,34.85 C1.1@27.625,22.825 C1.1@70.575,58.525 C1.1@109.075,41.55 C1.1@122.125,39.95 LF_M.1 LFer_L.1 LFerr_M.1 | length 260.6
  Top Layer w0.4: LF_M.1@19.075,34.85 LF_M.1@19.15,34.775
  Top Layer w1: LF_M.1@19.15,34.775 LF_M.1@19.15,35.294 ; C1.1@109.075,41.55 109.225,41.4 LF_M.1@112.65,41.4 112.65,42.9 113.05,43.3 115.525,43.3 117.425,41.4 117.425,19.425 112.46,14.46 BAT_IN.2@112.46,11.25
  Top Layer w1.5: C1.1@14.9,34.85 LF_M.1@19.075,34.85 ; C1.1@70.575,58.525 70.6,58.55 LFerr_M.1@74.5,58.55 76.35,56.7 v1(76.35,55.75) ; v1(76.325,49.15) 76.35,49.175 v1(76.35,45.725)
  Bottom Layer w0.4: 71.775,22.9 71.775,24.8
  Bottom Layer w1: 17.525,26.525 v1(17.525,34.875)
  Bottom Layer w1.5: LFer_L.1@18.45,24.65 18.475,24.675 25.925,24.675 27.7,22.9 71.775,22.9 94.35,22.9 106,11.25 BAT_IN.2@112.46,11.25 112.46,12.975 113.6,14.115 125.165,14.115 132.325,21.275 132.325,26.35 ; 71.775,24.8 71.775,38.25 76.35,42.825 v1(76.35,45.725) ; v1(76.325,49.15) 76.325,55.725 v1(76.35,55.75) ; C1.1@122.125,39.95 130.825,39.95 132.325,38.45 132.325,26.35 ; LFer_L.1@123.125,26.15 132.125,26.15 132.325,26.35 ; 126.575,27.25 126.625,27.3 126.625,27.45
NetC1_2: C1.2@7.1,30.15 R1.2 TJA1043.BAT@20.425,47.38 | length 30.9
  Top Layer w0.4: R1.2@7.05,27.15 C1.2@7.05,30.15 ; TJA1043.BAT@19.88,47.38 TJA1043.BAT@20.425,47.38
  Top Layer w0.6: R1.2@7.1,26.8 C1.2@7.1,30.15 7.1,36.525 12.425,41.85 15,41.85 19,45.85 19,46.5 TJA1043.BAT@19.88,47.38
NetC1_U_5v_REG_1_2: 12V1.2 C1.2@13.9,95.05 C2.2@19.3,95.05 C3.2@24.3,95.05 C4.2@29.325,95.05 LM2678-5.In@26.04,72.265 | length 54.5
  Bottom Layer w1.5: 12V1.2@3.35,86.89 12.635,86.89 26.558,72.967 26.558,72.783 LM2678-5.In@26.04,72.265 ; 11.415,86.89 13.9,89.375 C1.2@13.9,95.05 C2.2@19.3,95.05 C3.2@24.3,95.05 C4.2@29.325,95.05
NetC1_U_5v_REG_2_2: 12V2.2 C1.2@119.7,95.1 C2.2@115.1,95.1 C3.2@109.9,95.1 C4.2@104.9,95.1 LM2678-5.In@107.785,67.535 | length 79.8
  Bottom Layer w1.5: C4.2@104.9,95.1 C3.2@109.9,95.1 C2.2@115.1,95.1 C1.2@119.7,95.1 ; LM2678-5.In@107.785,67.535 108.085,67.535 110.975,70.425 110.975,75.65 111.7,76.375 115.55,76.375 120.125,80.95 120.125,94.675 C1.2@119.7,95.1 ; 123.013,95.737 132.2,86.55 12V2.2@132.2,86.065 130.06,86.065 127.75,88.375 127.325,88.375 120.6,95.1 C1.2@119.7,95.1
NetC2_2: C2.2@7.375,51.275 C22.2 L1.2@26.75,78.775 LM2678-5.FB@26.04,67.185 Reg1.2 TanC1.1@38.45,90.175 TanC2.1@46.725,90.35 TanC3.1@55.05,90.425 TJA1043.VCC | length 194.7
  Top Layer w0.8: C2.2@7.375,51.275 10.8,51.275 12.155,49.92 ; v1(10.325,49.5) 11.735,49.5 12.155,49.92 ; TJA1043.VCC@15.325,49.92 12.155,49.92 ; v1(96.393,53.836) 96.393,53.682 98.225,51.85 100.8,51.85 101.32,52.37 103.53,52.37 ; C22.2@99.925,54.725 101.175,54.725 103.53,52.37 ; TJA1043.VCC@105.55,52.37 103.53,52.37
  Bottom Layer w0.4: L1.2@26.75,78.775 L1.2@26.75,79.75
  Bottom Layer w0.5: LM2678-5.FB@26.04,66.69 LM2678-5.FB@26.04,67.185
  Bottom Layer w0.8: 65.65,94.175 68.75,94.175 75.325,87.6 93.45,87.6 94.65,86.4 94.65,68.9 96.393,67.157 v1(96.393,53.836)
  Bottom Layer w1: v1(10.325,49.5) 10.325,53.125 12.45,55.25 17.625,55.25 19.225,56.85 19.225,59.875 LM2678-5.FB@26.04,66.69
  Bottom Layer w1.5: LM2678-5.FB@26.04,67.185 27.135,67.185 28.19,68.24 28.19,72.082 ; L1.2@26.75,78.775 26.75,75.108 28.208,73.65 28.208,72.1 ; L1.2@26.75,79.75 20.65,85.85 20.65,90.3 22.475,92.125 37.975,92.125 38.45,91.65 TanC1.1@38.45,90.175 58.298,90.175 64.315,96.192 Reg1.2@64.315,96.425
NetC2_U_EMI_Prot_1_1: C2.1@9.4,21.6 LFer_L.2@18.45,19.35 PMOS.D@12.275,33.925 | length 24.3
  Bottom Layer w1.5: PMOS.D@12.688,33.513 13.075,33.125 13.075,24.05 10.625,21.6 C2.1@9.4,21.6 11.65,19.35 LFer_L.2@18.45,19.35
NetC2_U_EMI_Prot_2_1: C2.1@107.85,25.9 LFer_L.2@123.125,20.85 PMOS.D@107.15,36.7 | length 29.9
  Bottom Layer w0.4: C2.1@107.6,26.15 C2.1@107.85,25.9
  Bottom Layer w1: C2.1@107.85,26.1 PMOS.D@107.85,36.45 ; C2.1@107.875,25.925 107.875,22.775 108.575,22.075 109.8,20.85 LFer_L.2@123.125,20.85
NetC2_U_EMI_Prot_Circ1_1: C2.1@15.5,20.1 LF_M.2@20.9,34.775 PMOS.D@19.45,28.55 | length 17.2
  Top Layer w0.8: C2.1@15.5,20.1 19.45,24.05 PMOS.D@19.45,28.55 19.45,29.6 PMOS.D@21.075,31.225
  Top Layer w1: PMOS.D@21.075,31.225 LF_M.2@21.075,34.95
NetC2_U_EMI_Prot_Circ2_1: C2.1@113.025,25.625 LF_M.2@114.4,41.4 PMOS.D@113.075,35.1 | length 16.3
  Top Layer w0.4: C2.1@113.025,25.625 113.025,35.05 PMOS.D@113.075,35.1 114.4,36.425 LF_M.2@114.4,41.4
NetC2_U_EMI_Prot_Circ3_1: C2.1@76.45,80.025 LFerr_M.2 PMOS.D@76.025,73.425 | length 28.4
  Top Layer w0.4: LFerr_M.2@74.4,60.4 76.4,60.4 81.075,65.075 81.075,72.725 80.375,73.425 PMOS.D@76.025,73.425 76.45,73.85 C2.1@76.45,80.025
NetC3_2: C3.2@7.3,44.6 C13.2 C32.2 DZen1.D1 R11.2 R34.2 TJA1043.VIO | length 207.9
  Top Layer w0.4: C3.2@7.3,44.6 8.825,44.6 11.605,47.38 TJA1043.VIO@15.325,47.38 ; C3.2@7.825,44.5 5.325,44.5 3.775,46.05 3.775,79.8 15.9,91.925 43.4,91.925 47.925,87.4 47.925,60.2 R34.2@64.45,43.675 ; R11.2@64.45,55.875 R34.2@64.45,43.675 ; R34.2@64.85,43.175 64.45,43.575 R34.2@64.45,43.675 ; R34.2@64.9,43.225 DZen1.D1@70.5,43.225 84.175,43.225 89.025,48.075 94.75,48.075 95.275,47.55 C13.2@100.05,47.55 101.25,47.55 103.53,49.83 TJA1043.VIO@105.55,49.83 ; 99,47.5 100.95,47.5
NetC4_2: C4.2@30.725,39.55 R2.1 R3.2 TJA1043.SPLIT@20.425,48.65 | length 18.2
  Top Layer w0.4: TJA1043.SPLIT@20.3,48.65 24.05,48.65 25.125,47.575 25.125,43.275 25.425,42.975 R2.1@26.525,42.975 R3.2@26.525,39.525 C4.2@30.2,39.525
NetC5_2: C5.2 CANC2.7 CMC.OUT1@34.35,50.725 PESDC.I1@34.65,42.825 R2.2 | length 60.1
  Top Layer w0.4: R2.2@26.525,44.875 C5.2@30.7,44.875 30.7,48.625 32.7,50.625 36.075,50.625 37.925,48.775 37.925,42.145 ; PESDC.I1@34.65,42.825 37.245,42.825 37.925,42.145 ; 37.95,42.12 37.925,42.145 ; CANC2.7@46.66,15.105 46.895,15.105 49.475,17.685 49.475,18.55 37.925,30.1 37.925,42.145
NetC6_2: C6.2 CANC2.2 CMC.OUT2@34.35,48.225 PESDC.I2@34.65,41.5 R3.1 | length 49.8
  Top Layer w0.4: R3.1@26.525,37.625 28.625,37.625 30.875,35.375 C6.2@34.65,35.375 ; CMC.OUT2@34.35,48.225 32.75,46.625 32.75,42.475 33.725,41.5 PESDC.I2@34.65,41.5 C6.2@34.65,35.275 34.65,26.425 40.6,20.475 45.1,20.475 47.63,17.945 CANC2.2@48.045,17.945
NetC21_2: C21.2 R21.2 TJA1043.BAT@110.65,49.83 | length 22.6
  Top Layer w0.6: R21.2@99.675,32.95 99.675,38.375 107.775,46.475 107.775,49.035 108.57,49.83 TJA1043.BAT@110.65,49.83
NetC25_2: C25.2 CANC1.7 CMC.OUT1@126,57.525 PESDC.I1@123.6,37.45 R22.2 | length 103.2
  Top Layer w0.4: CANC1.7@83.335,15.03 85.44,12.925 108.275,12.925 v1(112.575,17.225) ; v1(117.425,17.275) 118.55,17.275 119.425,18.15 119.425,41.27 119.73,41.575 122.1,41.575 123.6,40.075 ; PESDC.I1@123.6,37.45 123.6,40.075 ; CMC.OUT1@126,57.525 124.525,57.525 120.4,53.4 R22.2@120.4,47.7 126.075,47.7 C25.2@126.275,47.9 128.025,47.9 128.275,47.65 128.275,40.925 128.3,40.925 126.825,39.45 124.225,39.45 123.6,40.075
  Bottom Layer w0.4: v1(112.575,17.225) 112.625,17.275 v1(117.425,17.275)
NetC26_2: C26.2 CANC1.2 CMC.OUT2@126,55.025 PESDC.I2@123.6,36.125 R23.1 | length 89.5
  Top Layer w0.4: CANC1.2@84.72,17.87 88.775,21.925 112.95,21.925 v1(114.775,23.75) ; R23.1@120.45,40.575 120.625,40.4 120.625,37.255 121.755,36.125 ; v1@120.7,23.625 v1(120.7,24) ; C26.2@120.8,30.825 120.65,30.675 120.65,24.325 v1@120.975,24 ; PESDC.I2@123.6,36.125 121.755,36.125 ; CMC.OUT2@126,55.025 129,52.025 129,33.6 127.75,32.35 121.6,32.35 120.8,31.55 120.8,35.17 121.755,36.125
  Bottom Layer w0.4: v1(114.775,23.75) v1@120.875,23.75
NetC33_2: C33.2 LFerr.1 TJA1027.LIN | length 24.1
  Top Layer w0.4: LFerr.1@60.725,79.3 55.7,79.3 52.1,75.7 C33.2@52.1,71.775 57.55,71.775 59.14,70.185 TJA1027.LIN@61.5,70.185
NetC36_2: C36.2 PMOS.S@78.554,66.975 TJA1027.BAT | length 40.3
  Top Layer w0.4: C36.2@52.3,68.55 57.125,68.55 57.49,68.915 TJA1027.BAT@61.5,68.915 63.065,68.915 63.6,69.45 63.6,72.9 64.875,74.175 69.5,74.175 70.9,72.775 70.9,64.825 72.3,63.425 75.004,63.425 77.939,66.36
NetC42_2: C42.2 R22.1 R23.2 TJA1043.SPLIT@110.65,51.1 | length 21
  Top Layer w0.4: TJA1043.SPLIT@110.65,51.1 113.825,51.1 119.125,45.8 R22.1@120.4,45.8 120.4,42.525 C42.2@126.15,42.525
NetCc1_U_5v_REG_1_1: Cc1.1@35.425,75.225 LM2678-5.CB@30.358,70.995 | length 6.2
  Bottom Layer w0.4: LM2678-5.CB@30.358,70.995 LM2678-5.CB@31.045,70.995
  Bottom Layer w1.5: LM2678-5.CB@31.045,70.995 Cc1.1@34.938,74.888
NetCc1_U_5v_REG_1_2: Cc1.2@35.425,76.925 L1.1@26.75,88.875 LM2678-5.S_Out@30.358,73.535 Schott_D1.1@15.575,52.3 Schott_D1.1@25.625,54.85 | length 67.2
  Bottom Layer w0.4: Schott_D1.1@15.575,52.3 18.425,52.3 20.975,54.85 Schott_D1.1@25.625,54.85 29.25,54.85 36.662,62.262
  Bottom Layer w1: L1.1@28.952,88.875 L1.1@28.975,88.875
  Bottom Layer w1.5: L1.1@26.75,88.875 L1.1@28.952,88.875 ; L1.1@28.975,88.875 38.1,79.75 39.425,79.75 39.975,79.2 39.975,65.575 36.662,62.262 ; LM2678-5.S_Out@30.358,73.535 31.212,73.535 34.502,76.825 35.325,76.825 Cc1.2@35.425,76.925
NetCc1_U_5v_REG_2_1: Cc1.1@102.1,82.775 LM2678-5.CB@103.467,68.805 | length 16.2
  Bottom Layer w1.5: Cc1.1@102.1,82.775 100.475,81.15 100.475,71.275 102.945,68.805 LM2678-5.CB@103.467,68.805
NetCc1_U_5v_REG_2_2: Cc1.2@102.1,84.475 L1.1@111.675,88.875 LM2678-5.S_Out@103.467,66.265 Schott_D1.1@109.95,52.425 Schott_D1.1@120,49.875 | length 66.9
  Bottom Layer w0.4: Schott_D1.1@110.85,53.75 Schott_D1.1@112.975,51.625
  Bottom Layer w1: LM2678-5.S_Out@103.144,66.265 LM2678-5.S_Out@103.467,66.265
  Bottom Layer w1.5: Schott_D1.1@110.15,53.625 104.125,53.625 103.467,54.283 103.467,65.158 97.375,71.25 97.375,82.25 99.6,84.475 Cc1.2@102.1,84.475 106.6,88.975 L1.1@113.35,88.975 ; Schott_D1.1@113.475,49.85 Schott_D1.1@120.875,49.85
NetCMC2_IN1: CMC.IN1@118.6,57.525 TJA1043.CANH@110.65,53.64 | length 9.6
  Top Layer w0.4: TJA1043.CANH@110.65,53.64 113.465,53.64 117.35,57.525 CMC.IN1@118.6,57.525